# Altium PCB B223.PcbDoc
Units mm, origin at the board's own origin, x right, y up, seen from the top; angles counter-clockwise.
Board outline 22 x 40 mm, 4 copper layers (Top Copper, Signal Layer 1, Signal Layer 2, Bottom Copper), stack 1.57 mm thick; 30 components, 34 nets, 134 pads, 164 vias.
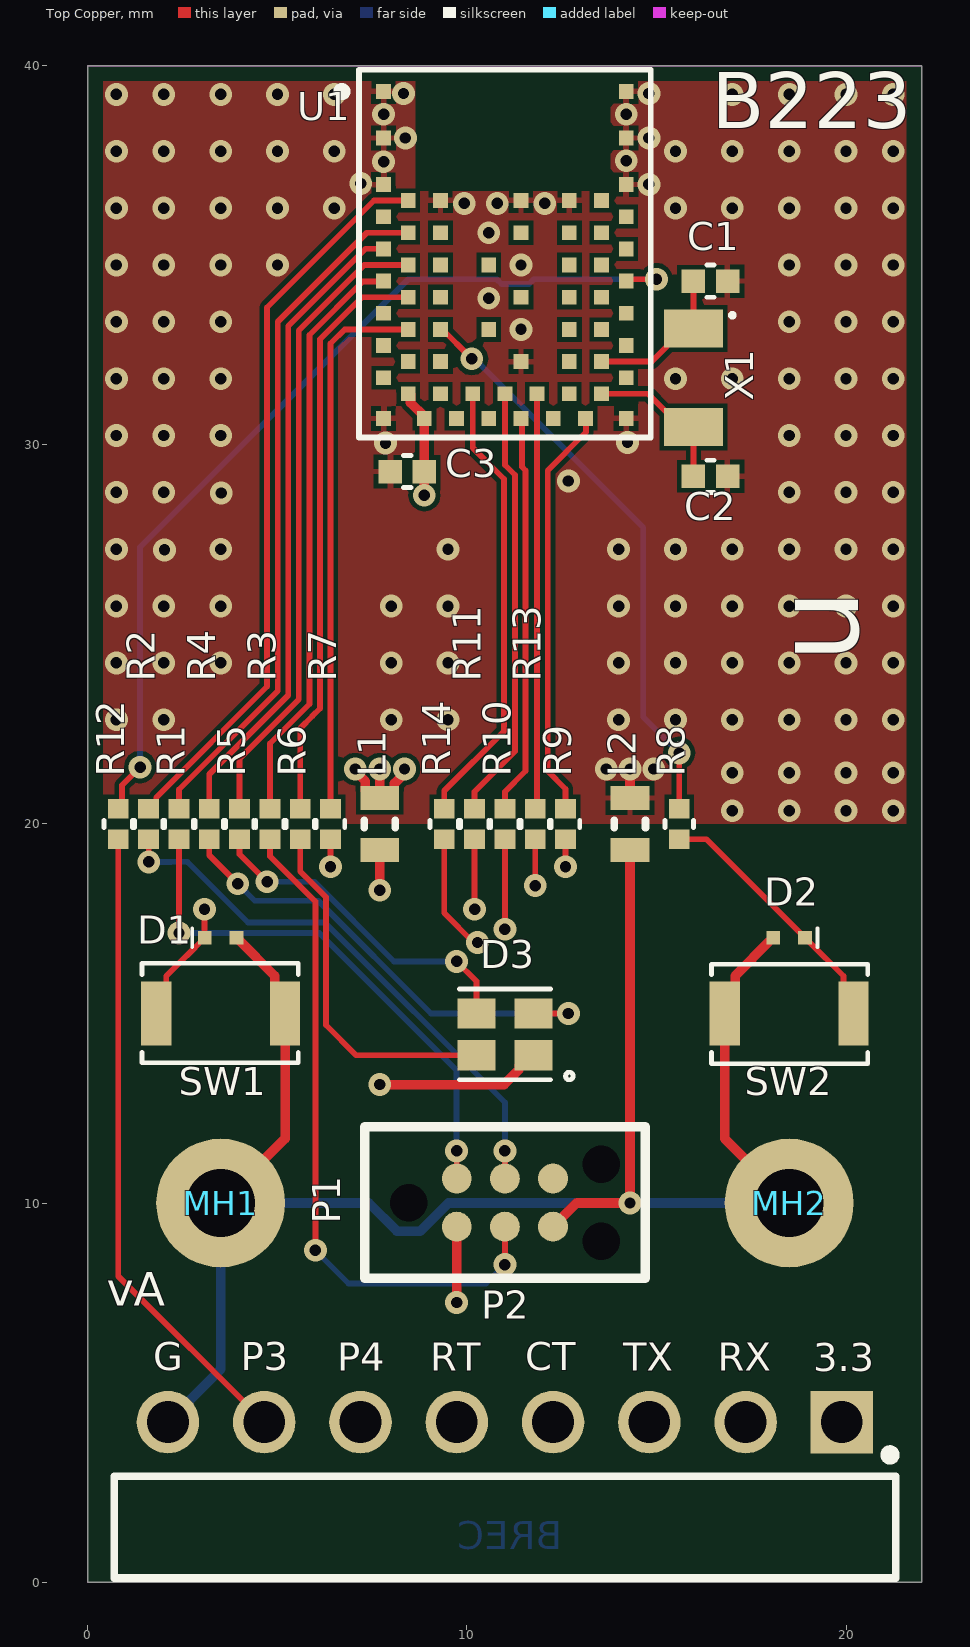
[diagram p0: Top Copper view]
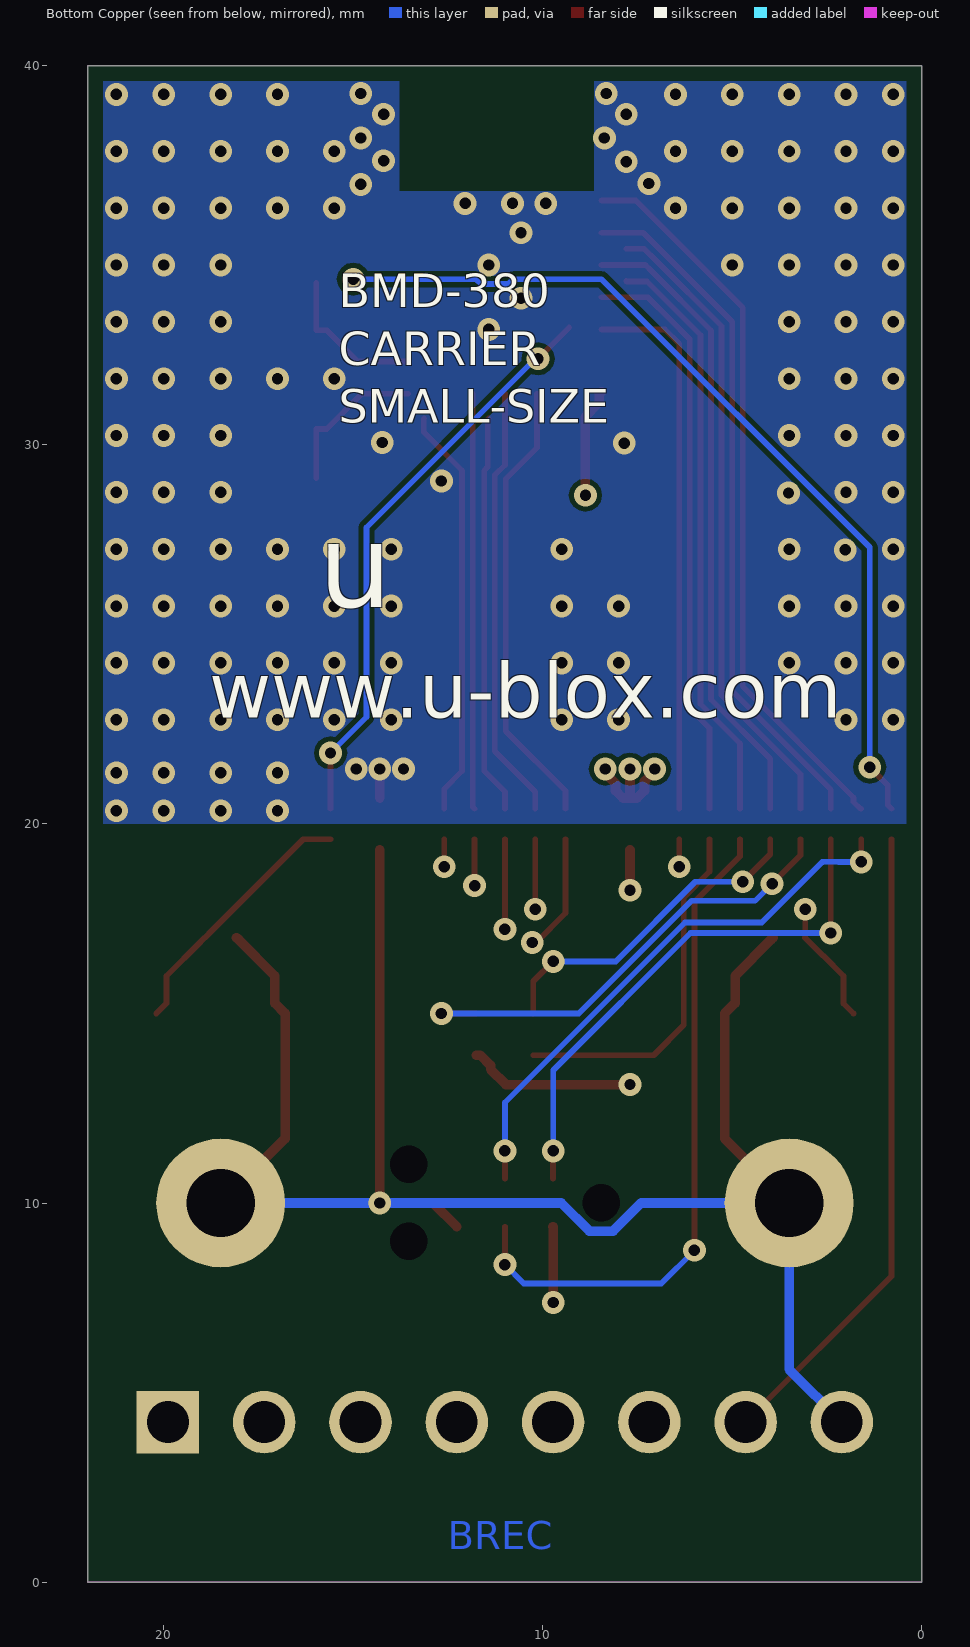
[diagram p1: Bottom Copper view, seen from below]
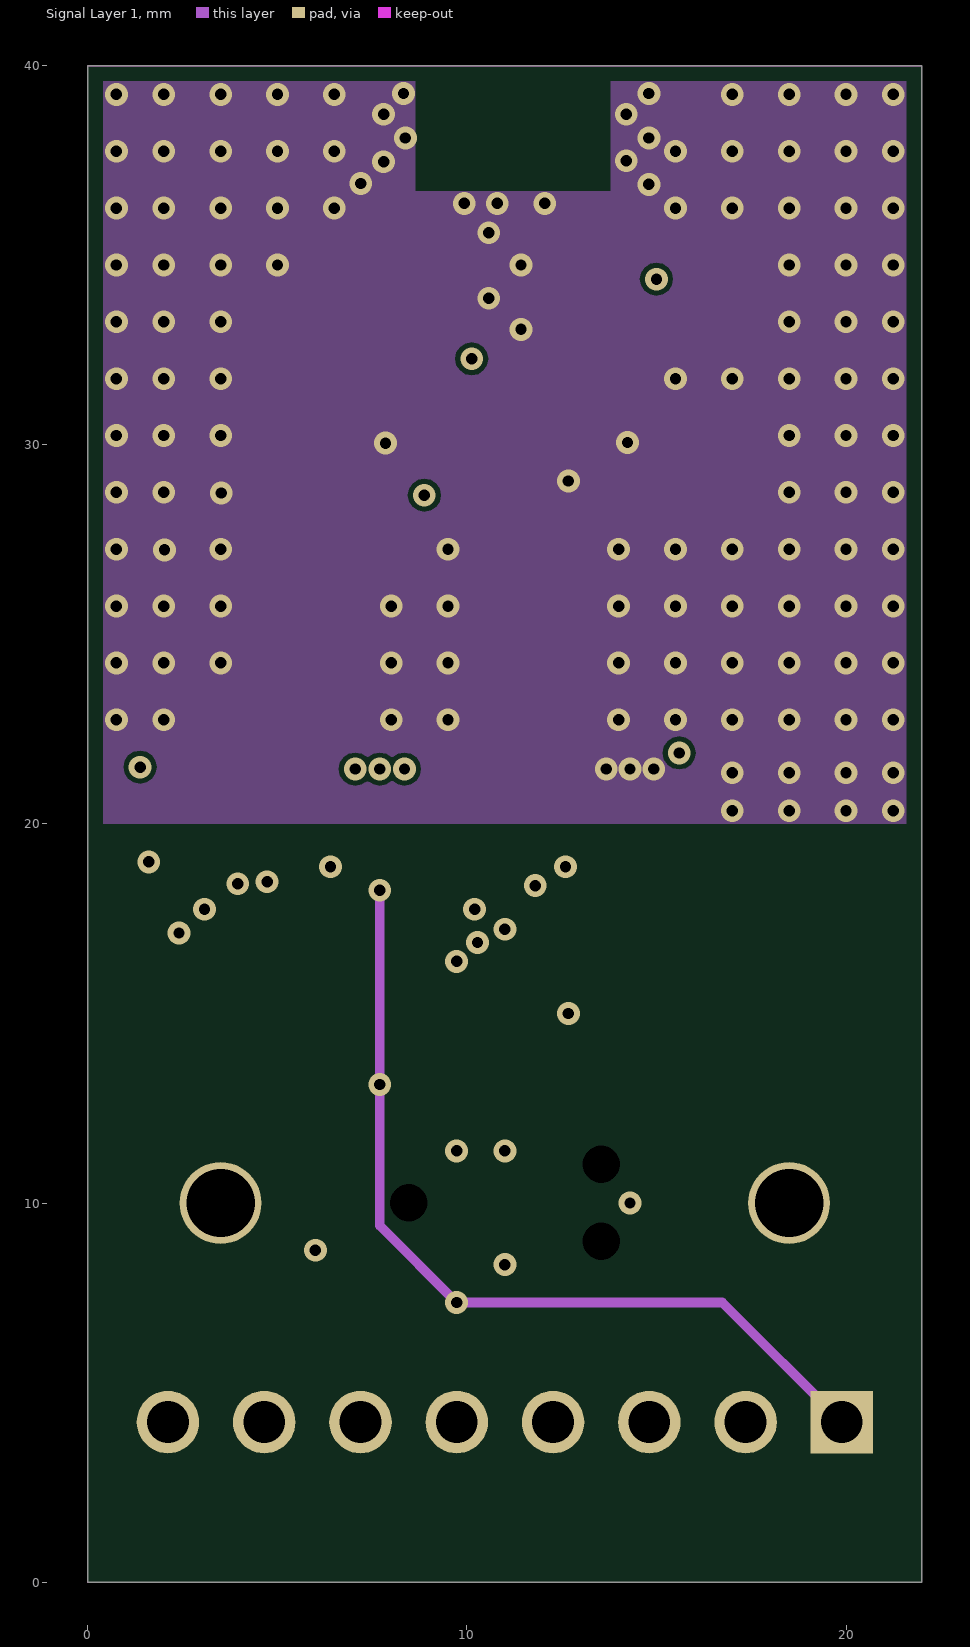
[diagram p2: Signal Layer 1]
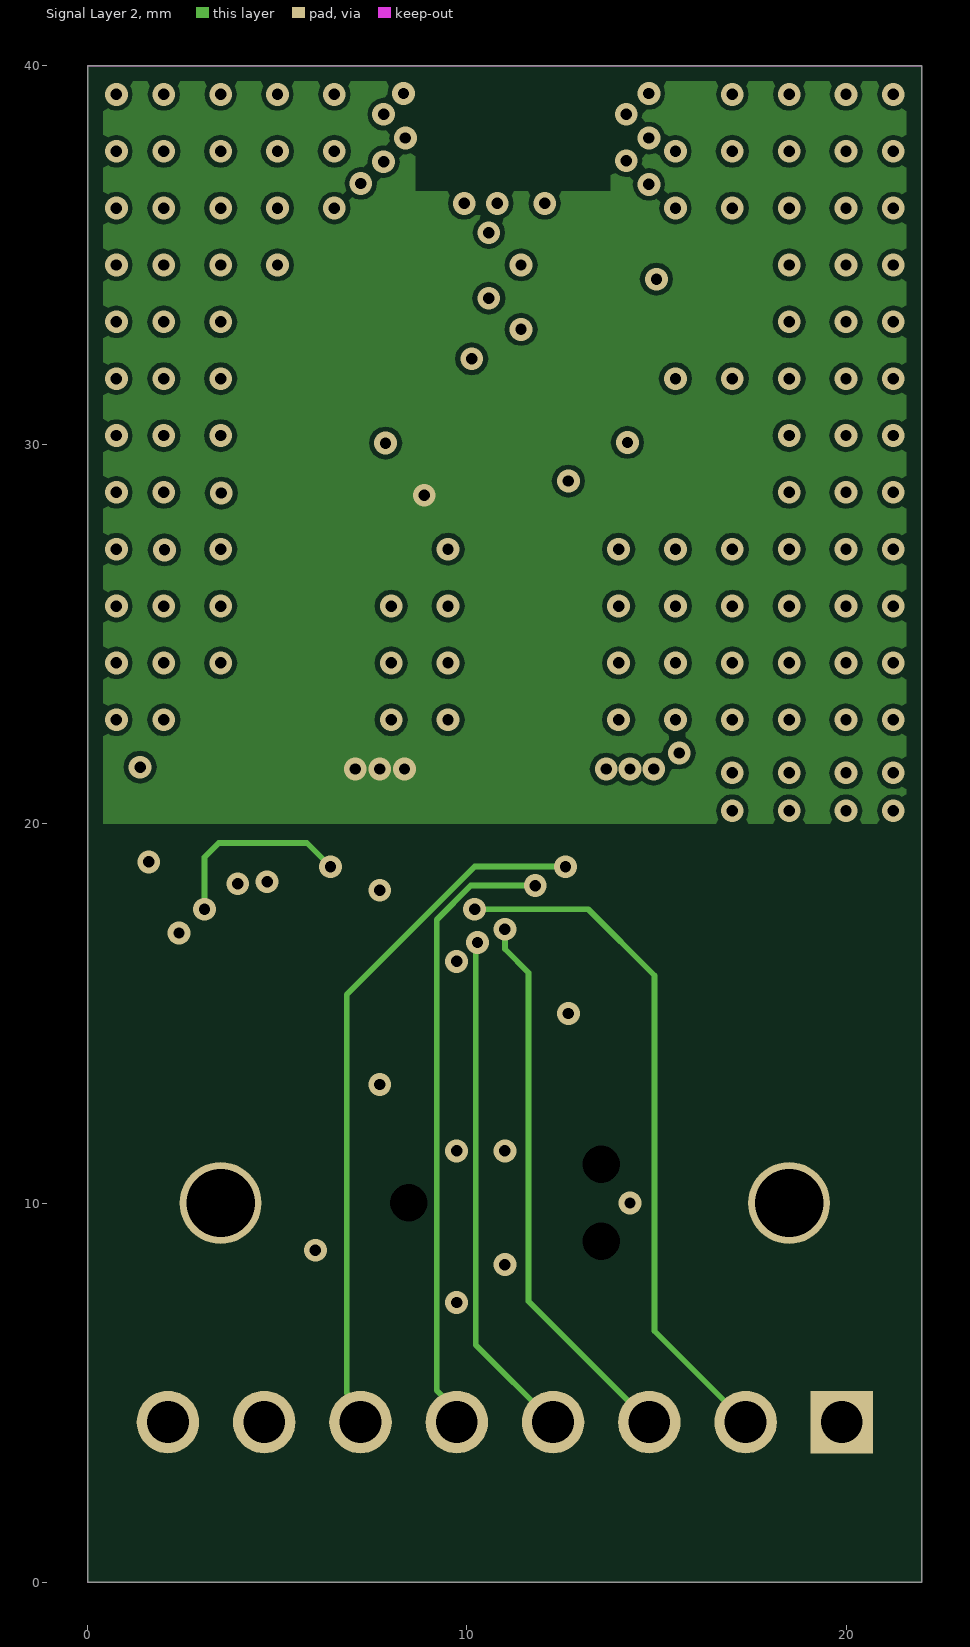
[diagram p3: Signal Layer 2]

## Layer stack, top to bottom
Top Mask: solder mask 0.015, Solder Resist, Dk 3.8
Top Copper: signal copper 0.035
Dielectric 1: prepreg 0.1, 2313, Dk 4.05
Signal Layer 1: signal copper 0.0175
Core: core 1.265, FR-4, Dk 4.5
Signal Layer 2: signal copper 0.0175
Dielectric 2: prepreg 0.1, 2313, Dk 4.05
Bottom Copper: signal copper 0.035
Bottom Mask: solder mask 0.015, Solder Resist, Dk 3.8

## Board outline
0,40 22,40 22,0 0,0

## Design rules (kind name [scope] priority, off if disabled: settings)
BoardOutlineClearance [All] p1: gap=0.4 ignorepadtopadclearanceinfootprint=FALSE
Clearance "Stitching GND" [IsStitchingVia and InNet('GND') vs (IsVia and (Not IsStitchingVia)) Or IsPad] p1: gap=0.127 ignorepadtopadclearanceinfootprint=TRUE
Clearance Clearance_Poly [InPolygon vs OnLayer('Keep-Out Layer') OR (OnLayer('Multi-Layer') AND IsPad  AND Not(PadIsPlated))] p2: gap=0.127 ignorepadtopadclearanceinfootprint=TRUE
Clearance [All] p3: gap=0.127 ignorepadtopadclearanceinfootprint=FALSE except(0: Arc-Text Arc-Hole Track-Text Track-Hole SMDPad-Text SMDPad-Hole THPad-Text THPad-Hole Via-Text Via-Hole Fill-Text Fill-Hole Poly-Text Poly-Hole Region-Text Region-Hole Text-Text Text-Hole)
ComponentClearance [All] p1: gap=0.127 collisioncheckmode=3 verticalgap=0.254 showdistances=FALSE
DiffPairsRouting .14 [All] p1: maxlimit=0.254 minlimit=0.1 mostfreqgap=0.254 toplayer_maxgap=0.1 toplayer_prefgap=0.1 toplayer_minwidth=0.1 toplayer_maxwidth=0.1 toplayer_prefwidth=0.1 midlayer1_mingap=0.254 midlayer1_minwidth=0.381 midlayer1_maxwidth=0.381 midlayer1_prefwidth=0.381 midlayer2_mingap=0.254 midlayer2_minwidth=0.381 midlayer2_maxwidth=0.381 midlayer2_prefwidth=0.381 bottomlayer_maxgap=0.1 bottomlayer_prefgap=0.1 bottomlayer_minwidth=0.1 bottomlayer_maxwidth=0.1 bottomlayer_prefwidth=0.1 maxuncoupledlength=12.7
Height [All] p1: minheight=0 maxheight=25.4 prefheight=2.54
HoleSize [All] p1: absolutevalues=TRUE maxlimit=2540 minlimit=0.127 maxpercent=80.000 minpercent=20.000
HoleToHoleClearance [All] p1: gap=0.152 allowstackedmicrovias=TRUE
MinimumSolderMaskSliver [All] p1: minsoldermaskwidth=0.025
PlaneClearance [InPoly] p1: clearance=0.254
PlaneConnect [All] p1: pad.planeconnectstyle=Relief pad.reliefexpansion=0.508 pad.reliefentries=4 pad.reliefconductorwidth=0.254 pad.reliefairgap=0.254 via.planeconnectstyle=Direct via.reliefexpansion=0.508 via.reliefentries=4 via.reliefconductorwidth=0.254 via.reliefairgap=0.254
PolygonConnect ThermalVias [IsVia] p1: connectstyle=Direct reliefconductorwidth=0.254 reliefentries=4 polygonreliefangle="90 Angle" airgapwidth=0.254
PolygonConnect "PolygonConnect - Power" [InNetClass('')] p2: connectstyle=Relief reliefconductorwidth=0.254 reliefentries=4 polygonreliefangle="90 Angle" airgapwidth=0.127
PolygonConnect PolygonConnect-BGA [InComponentClass('')] p3: connectstyle=Relief reliefconductorwidth=0.152 reliefentries=4 polygonreliefangle="45 Angle" airgapwidth=0.152
PolygonConnect PolygonConnect-General [All] p4: connectstyle=Relief reliefconductorwidth=0.152 reliefentries=4 polygonreliefangle="90 Angle" airgapwidth=0.127
RoutingVias [All] p1: holewidth=0.3 width=0.6 viastyle="Through Hole" minholewidth=0.2 minwidth=0.5 maxholewidth=7 maxwidth=1
SMDEntry [All] p1 off: side=TRUE corner=TRUE anyangle=TRUE
SilkToBoardRegionClearance [All] p1 off:
SilkToSilkClearance [All] p1 off: silktosilkclearance=0.025
SilkToSolderMaskClearance [IsPad] p1 off: minsilkscreentomaskgap=0 clearancetoexposedcopper=TRUE
SolderMaskExpansion SolderMaskExpansion_via [IsVia] p1: expansion=-0.254 istentingtop=TRUE
SolderMaskExpansion [All] p2: expansion=0.05 istentingtop=FALSE
UnRoutedNet [All] p1: checkbadconnections=TRUE
ViasUnderSMD [All] p1: allowed=FALSE
Width [All] p1: maxlimit=2.54 minlimit=0.127 preferedwidth=0.152 toplayer_maxwidth=0.254 toplayer_prefwidth=0.152 bottomlayer_maxwidth=0.254 bottomlayer_prefwidth=0.152 minimp=50.000000 maximp=50.000000 favimp=50.000000
Width Width_1 [All] p2: maxlimit=0.254 minlimit=0.254 preferedwidth=0.254
18 further rules are at their usual default settings.

## Components (designator, comment, footprint, x,y, rotation, side; value= is the part's Value field where it differs from the comment)
C1 "UBXH01-000411410P" "Cap 0402" 16.425,34.325 r0 top value=10P
C2 "UBXH01-000411410P" "Cap 0402" 16.425,29.175 r0 top value=10P
C3 "UBXH01-2021002100N" "Cap 0402" 8.425,29.3 r180 top value=100N
D1 "110-00019" SOD-923 3.5,17 r0 top
D2 "110-00019" SOD-923 18.5,17 r180 top
D3 "115-00011" 4-PLCC 11,14.45 r0 top
L1 "LQW18AN22NJ10D" INDC1608X100X30LL20T10 7.7,20 r90 top
L2 "LQW18AN22NJ10D" INDC1608X100X30LL20T10 14.3,20 r90 top
MH1 "MH_M1.5DNP" MH_M1.5 3.5,10 r0 top
MH2 "MH_M1.5DNP" MH_M1.5 18.5,10 r0 top
P1 "TC2030-IDC-NLDNP" TC2030-IDC-NL 8.46,10.01 r0 top
P2 "61300811021" 61300811021 11,1.45 r0 top
R1 "180-00098220R" "RES 0402 HD" 2.4,20 r270 top value=220R
R2 "180-00098220R" "RES 0402 HD" 1.6,20 r270 top value=220R
R3 "180-00098220R" "RES 0402 HD" 4.8,20 r270 top value=220R
R4 "180-00031499R" "RES 0402 HD" 3.2,20 r270 top value=499R
R5 "180-00098220R" "RES 0402 HD" 4,20 r270 top value=220R
R6 "180-00098220R" "RES 0402 HD" 5.6,20 r270 top value=220R
R7 "180-00098220R" "RES 0402 HD" 6.4,20 r270 top value=220R
R8 "180-00098220R" "RES 0402 HD" 15.6,20 r270 top value=220R
R9 "180-00098220R" "RES 0402 HD" 12.6,20 r90 top value=220R
R10 "180-00098220R" "RES 0402 HD" 11,20 r90 top value=220R
R11 "180-00098220R" "RES 0402 HD" 10.2,20 r90 top value=220R
R12 "180-00098220R" "RES 0402 HD" 0.8,20 r90 top value=220R
R13 "180-00098220R" "RES 0402 HD" 11.8,20 r90 top value=220R
R14 "180-00098220R" "RES 0402 HD" 9.4,20 r90 top value=220R
SW1 "135-00007" B3U-1000P 3.5,15 r0 top
SW2 "135-00007" B3U-1000P 18.5,15 r180 top
U1 "=Value" BMD_LGA63S_950X750X150_CHIP 11,35.05 r0 top
X1 "100-00005" XTAL_3215 15.975,31.775 r270 top

## Footprints (in the part's own frame and the unit in brackets; to place one, negate y for a bottom-side part, rotate by r counter-clockwise, add the part's x,y. Pads: shape width x height; smd on the part's side, far side on the other; paste and mask are expansions set on the pad)
4-PLCC [mm] "4 Pin Plastic Leaded Chip Carrier, 2mm x 2mm"
  rect 1x0.8 smd: 1(0.75,-0.55) 2(-0.75,-0.55) 3(-0.75,0.55) 4(0.75,0.55)
  silkscreen extent -1.2,-1.2 1.8,1.2, body extent -1.05,-1.05 1.05,1.05, height 1.01
61300811021 [mm]
  rect 1.65x1.65 hole 1.1: 1(8.89,2.77)
  round 1.65 hole 1.1: 2(6.35,2.77) 3(3.81,2.77) 4(1.27,2.77) 5(-1.27,2.77) 6(-3.81,2.77) 7(-6.35,2.77) 8(-8.89,2.77)
  silkscreen extent -10.31,-1.35 10.31,2.03, body extent -10.16,-7.27 10.16,3.09, height 2.58
B3U-1000P [mm] "Button Tactile, SMT 4mm x 2.5mm, height 1.2mm"
  rect 0.8x1.7 smd: 1(-1.7,0) 2(1.7,0)
  silkscreen extent -2.07,-1.3 2.05,1.33, body extent -2,-1.25 2,1.25, height 1.6
BMD_LGA63S_950X750X150_CHIP [mm] "WLCSP, 63pin, 0.85mm Pitch, 9.5mm x 7.5mm"
  rect 0.39x0.39 smd: 1(-3.2,4.275) 2(-3.2,3.05) 3(-3.2,1.825) 4(-2.55,1.4) 5(-1.7,1.4) 6(-3.2,0.975) 7(-2.55,0.55) 8(-1.7,0.55) 9(-3.2,0.125) 10(-2.55,-0.3) 11(-1.7,-0.3) 12(-3.2,-0.725) 13(-2.55,-1.15) 14(-1.7,-1.15) 15(-3.2,-1.575) 16(-2.55,-2) 17(-1.7,-2) 18(-3.2,-2.425) 19(-2.55,-2.85) 20(-1.7,-2.85) 21(-3.2,-3.275) 22(-2.55,-3.7) 23(-3.2,-4.35) 24(-2.125,-4.35) 25(-1.7,-3.7) 26(-1.275,-4.35) 27(-0.85,-3.7) 28(-0.425,-4.35) 29(0,-3.7) 30(0.425,-4.35) 31(0.85,-3.7) 32(1.275,-4.35) 33(1.7,-3.7) 34(2.125,-4.35) 35(3.2,-4.35) 36(2.55,-3.7) 37(3.2,-3.275) 38(2.55,-2.85) 39(1.7,-2.85) 40(3.2,-2.425) 41(2.55,-2) 42(1.7,-2) 43(3.2,-1.575) 44(2.55,-1.15) 45(1.7,-1.15) 46(3.2,-0.725) 47(2.55,-0.3) 48(1.7,-0.3) 49(3.2,0.125) 50(2.55,0.55) 51(1.7,0.55) 52(3.2,0.975) 53(2.55,1.4) 54(1.7,1.4) 55(3.2,1.825) 56(3.2,3.05) 57(3.2,4.275) 58(0.425,1.4) 59(0.425,0.55) 60(-0.425,-0.3) 61(0.425,-1.15) 62(-0.425,-2) 63(0.425,-2.85)
  Multi-Layer pour cut-out: -3.75,4.75 -3.75,4.55 -2.36,4.55 -2.36,1.65 2.79,1.65 2.79,4.55 3.75,4.55 3.75,4.75
  silkscreen extent -4.4,-4.85 3.85,4.85, body extent -3.75,-4.75 3.75,4.75, height 1.53
"Cap 0402" [mm] "Chip Capacitor, 2-Leads, Body 1.00x0.50mm, IPC Medium Density"
  rect 0.62x0.62 smd: 1(-0.45,0) 2(0.45,0)
  silkscreen extent -0.1,-0.43 0.1,0.43, body extent -0.55,-0.3 0.55,0.3, height 0.6
INDC1608X100X30LL20T10 [mm] "Chip Inductor, 2-Leads, Body 1.8x1.1mm, IPC High Density"
  rect 0.64x1.02 smd: 1(-0.685,0) 2(0.685,0)
  silkscreen extent -0.1,-0.41 0.1,0.41, body extent -0.9,-0.55 0.9,0.55, height 1
MH_M1.5 [mm] "Mounting Hole M1.5 Metric, 3.4mm diameter pad"
  round 3.4 / inner round 2.159 / far side round 3.4 hole 1.8: 1(0,0)
"RES 0402 HD" [mm] "Chip Resistor, 2-Leads, Body 1.05x0.54mm, IPC High Density"
  rect 0.52x0.55 smd: 1(-0.4,0) 2(0.4,0)
  silkscreen extent -0.1,-0.38 0.1,0.38, body extent -0.55,-0.3 0.55,0.3, height 0.4
SOD-923 [mm] "SOD-923, 2-Leads, Body 1.25x2.50mm, IPC High Density,"
  rect 0.36x0.35 smd mask+0.05: 1(-0.42,0) 2(0.42,0)
  silkscreen extent -0.75,-0.25 -0.75,0.25, body extent -0.4,-0.3 0.4,0.3, height 0.4
TC2030-IDC-NL [mm] "Tag-Connect 6-Pin No Legs"
  round 0.9 hole 0.995 unplated: 0(0,0) 0(5.08,-1.016) 0(5.08,1.016)
  round 0.79 smd paste-0.39: 1(1.27,-0.635) 2(1.27,0.635) 3(2.54,-0.635) 4(2.54,0.635) 5(3.81,-0.635) 6(3.81,0.635)
  silkscreen extent -1.16,-2 6.24,2
XTAL_3215 [mm] "XTAL, 2-Leads, Body 1.50x3.20mm"
  rect 1x1.55 smd: 1(-1.3,0) 2(1.3,0)
  silkscreen extent -1.7,0.98 -1.6,1.07, body extent -1.65,-0.8 1.65,0.8, height 0.9

## Part data
C1 C2: library part UBXH01-0004114, "CAP CER COG 0402", Manufacturer="Murata Manufacturing Company, Ltd.", Manufacturer 2=None, Manufacturer P/N=GRM1555C1H100CZ01, Max Voltage=25.0V, Tolerance=5%, Automotive=None, Critical=None, Editor=martin.frauchiger, Env=ROHS, Manufacturer 3=None, Manufacturer P/N 2=None, Manufacturer P/N 3=None, Max Current=None, Max Operating Temp=None, Max Power=None, Mfg P/N Datasheet=None, Mfg P/N Datasheet 2=None, Mfg P/N Datasheet 3=None, Mfg P/N Released=Yes, Mfg P/N Released 2=None, Mfg P/N Released 3=None, Mfg P/N Split=0, Mfg P/N Split 2=None, Mfg P/N Split 3=None, Mfg P/N Status=Obsolete, Mfg P/N Status 2=None, Mfg P/N Status 3=None, Min Operating Temp=None, Part Number=UBXH01-0004114, Part Type=Capacitor, Perferred=PREF, Permitted Use="Volume Products", RefDes=C, Release Data="2005-09-01 15:36:53", Released by=martin.frauchiger, Single Source=None, Size=0x0y, UBX Wiki=https://wiki.u-blox.com/bin/view/Operations/PartDetails?index=5225
C3: library part UBXH01-2021002, "CAP CER X5R 0402", Manufacturer="Samsung Electro-Mechanics", Manufacturer 2=None, Manufacturer P/N=CL05A104KP5NNN, Max Voltage=10.0V, Tolerance=10%, Automotive=None, Critical=None, Editor=roland.rust, Env=GREEN, Manufacturer 3=None, Manufacturer P/N 2=None, Manufacturer P/N 3=None, Max Current=None, Max Operating Temp=None, Max Power=None, Mfg P/N Datasheet=https://wiki.u-blox.com/bin/view/Generic/Docs/DocumentSummary?index=28113, Mfg P/N Datasheet 2=None, Mfg P/N Datasheet 3=None, Mfg P/N Released=Yes, Mfg P/N Released 2=None, Mfg P/N Released 3=None, Mfg P/N Split=0, Mfg P/N Split 2=None, Mfg P/N Split 3=None, Mfg P/N Status=Active, Mfg P/N Status 2=None, Mfg P/N Status 3=None, Min Operating Temp=None, Part Number=UBXH01-2021002, Part Type=Capacitor, Perferred=PREF, Permitted Use="Volume Products", RefDes=C, Release Data="2005-07-22 13:59:44", Released by=roland.rust, Single Source=None, Size=0x0y, UBX Wiki=https://wiki.u-blox.com/bin/view/Operations/PartDetails?index=5759
D1 D2: "Diode, ESD9B, 3.3V, ST5G, SOD-923", Manufacturer="ON Semiconductor", Manufacturer P/N=ESD9B3.3ST5G, MFG Package=SOD-923, Package Type=SOD, Part Name="Diode TVS 3.3V SOD-923", Voltage=3.3V, Arena Link=https://app.bom.com/a/4M5DJQ9Q9SR7DV4H?v=spec.summary, Body Size="0.8mm x 0.6mm", Component Mounting Type=SMT, Diode Type=TVS, Height=0.4mm, Item_Phase=Production, Part Number=110-00019, Part_Type=Diode, Pins=2, Revision=0A, Supplier 1=Arrow, Supplier Part Number 1=ESD9B3.3ST5G, Use in new designs=Yes
D3: "LED, RGB Diffused SMT, PLCC4 4 Pin", Color=RGB, Current="20mA Red, 10mA Green, 10mA, Blue", Manufacturer="Cree, Inc.", Manufacturer P/N=CLMVB-FKA-CFHEHLCBB7a363, MFG Package=PLCC4, Package Type=Custom, Part Name="LED RGB SMT 2mm x 2mm", Supplier Part Number 1=941-CLMVBFKACFHEHLCB, Voltage=5V, Arena Link=https://app.bom.com/a/UCV39GZGZIHY581D?v=spec.summary, Body Size="2.0mm x 2.0mm", Component Mounting Type=SMT, Height=1mm, Item_Phase=Production, Mounting Type=Vertical, Number of Circuits=3, Part Number=115-00011, Part_Type=LED, Pins=4, Revision=0A, Supplier 1=Mouser, Use in new designs=Yes, Vf="2V Red, 3V Green, 3V Blue"
L1 L2: library part CMP-2000-06600-1, "Chip Inductor, 22 nH, +/-5%, 640 mA, -55 to 125 degC, 0603 (1608 Metric), RoHS, Tape and Reel", Current Rating=640mA, DC Resistance (DCR)=99mOhmMax, Frequency - Self Resonant=3.2GHz, Frequency - Test=100MHz, Inductance=22nH, Manufacturer=Murata, Operating Temperature=-55°C~125°C, Package / Case=0603(1608Metric), Package Description="2-Pin Surface Mount Device, Body 1.6 x 0.8 mm", Package Reference=0603, Q @ Freq=42@250MHz, Standard Package=1, Tolerance=±5%, Category=Inductors,Coils,Chokes, Datasheet URL=http://search.murata.co.jp/Ceramy/image/img/PDF/ENG/L0075S0080LQW18A_10.pdf, Datasheet Version=11/2011, Family=FixedInductors, Height - Seated (Max)="0.039\"(1.00mm)", Manufacturer URL=http://www.murata.com/, Material - Core=Non-Magnetic, Mounting Technology=SurfaceMount, Mounting Type=SurfaceMount, Online Catalog=LQWSeries, Other Names=490-6876-1, Packaging=CutTape(CT), Product Training Modules=InductorProductsChipRFInductors, Series=LQW18A_10, Shielding=Unshielded, Size / Dimension="0.063\"Lx0.031\"W(1.60mmx0.80mm)", Type=Wirewound
MH1 MH2: library part MH_M1.5, "1.5M screw mounting hole, plated", Added By="Jeremy D", Added Date=7/9/2015, DNP=DNP, Height=0mm, Part Number=MH_M1.5, Size="3.4mm x 3.4mm", Type="Mounting Hole"
P1: library part TC2030-IDC-NL, "CON PADS FOR CBL PLUG-OF-NAILS 6-PIN NO LEGS", Manufacturer="TAG Connect", Added By="Paul B", Added Date=4/22/2015, DNP=DNP, Height=0, Manufacturer P/N=TC2030-IDC-NL, Part Number=TC2030-IDC-NL, Size="6.731mm x 12.446mm"
P2: library part CMP-1502-01075-1, "THT Angled Pin Header WR-PHD, Pitch 2.54 mm, Single Row, 8 pins", Contact Resistance=20mOhm, Manufacturer="Wurth Electronics", Operating Temperature=-40to105degC, Rated Current=3A, Withstanding Voltage=500VAC, Working Voltage=250VAC, Datasheet URL=https://katalog.we-online.de/em/datasheet/6130xx11021.pdf, Gender=Male, Manufacturer Part Number=61300811021, Manufacturer URL=http://www.we-online.de, Mounting Technology=THT, Orientation=Angled, Package Reference=61300811021, Packaging=Bag, Part Number=61300811021, Pin Number=8, Pitch=2.54mm, Publisher=WurthElektronik, Row Number=Single
R1 R2 R3 R5 R6 R7 R8 R9 R10 R11 R12 R13 R14: library part 180-00098, "Resistor, 220ohm, 5%, 1/16W, 0402.", Manufacturer="Panasonic Electronic Components", Manufacturer 2="Samsung Electro-Mechanics America, Inc", Manufacturer P/N=ERJ-2GEJ221X, Manufacturer P/N 2=RC1005J221CS, Part Name="RES SMD 220 OHM 5% 1/16W 0402", Power=1/16W, Supplier Part Number 1=P220JCT-ND, Tolerance="+/- 5%", Alternate Footprint Ref="RES 0402", Arena Link=https://app.bom.com/a/8Q9HNUDUDWVBJC30?v=spec.summary, Component Mounting Type=SMT, Height=0.4mm, Item_Phase=Production, Part Number=180-00098, Part_Type=Resistor, Pins=2, Revision=0C, Size=0402, Supplier 1=Digi-Key, Supplier 2=Digi-Key, Supplier Part Number 2=1276-4360-1-ND, Use in new designs=Yes
R4: library part 180-00031, "Resistor, 499ohm, 1%, 1/16W, 0402", Manufacturer="Rohm Semiconductor", Manufacturer 2="Samsung Electro-Mechanics America, Inc", Manufacturer P/N=MCR01MRTF4990, Manufacturer P/N 2=RC1005F4990CS, Part Name="RES SMD 499 OHM 1% 1/16W 0402", Power=1/16W, Supplier Part Number 1=RHM499CDCT-ND, Tolerance="+/- 1%", Alternate Footprint Ref="RES 0402", Arena Link=https://app.bom.com/a/Q8RZ5CVCVEDU1SS5?v=spec.summary, Component Mounting Type=SMT, Height=0.4mm, Item_Phase=Production, Part Number=180-00031, Part_Type=Resistor, Pins=2, Revision=0D, Size=0402, Supplier 1=Digi-Key, Supplier 2=Digi-Key, Supplier Part Number 2=1276-3992-1-ND, Use in new designs=Yes
SW1 SW2: "Button, Momentary SPST-NO, 0.05A, 12V, 3mm x 2.5mm", Current=50mA, Manufacturer="Omron Electronics Inc-EMC Div", Manufacturer P/N=B3U-1000P, Part Name="SWITCH TACTILE SPST-NO 0.05A 12V", Supplier Part Number 1=SW1020CT-ND, Voltage=12VDC, Arena Link=https://app.bom.com/a/TBU28FYFYHGV5FQ0?v=spec.summary, Body Size="3mm x 2.5mm", Component Mounting Type=SMT, Height=1.2mm, Item_Phase=Production, Part Number=135-00007, Part_Type=Button, Pins=2, Revision=0A, Supplier 1=Digi-Key, Switch/Button Circuit=SPST, Switch/Button Function=Off-Mom, Use in new designs=Yes
U1: library part BMD-380, "u-blox BMD-380 Bluetooth 5 LE, 802.15.4 module", Manufacturer=u-blox, Manufacturer P/N=BMD-380-A-R, Body Size="9.5mm x 7.5mm", Height=1.5mm, Internal Antenna=Yes, Part Number=BMD-380, Protocol="BT 5.1 LE, 802.15.4, 2.4GHz Proprietary"
X1: "XTAL, 2Pin, 32.768kHz, 7pF 20ppm", Frequency=32.768kHz, Frequency Tolerance=20ppm, Manufacturer=Epson, Manufacturer 2="AVX Corporation", Manufacturer P/N="FC-135 32.7680KA-AG3", Manufacturer P/N 2=ST3215SB32768C0HPWBB, MFG Package=2-SMD, Part Name="XTAL 32.768kHz 7pF 20ppm 3215", Supplier Part Number 1=SER4086CT-ND, Arena Link=https://app.bom.com/a/L3MU07Q7Q98O5PC8?v=spec.summary, Body Size="3.2mm x 1.5mm", CL=7pF, Component Mounting Type=SMT, Height=0.9mm, Item_Phase=Production, Part Number=100-00005, Part_Type=Crystal/Oscillator, Pins=2, Revision=0C, Supplier 1=Digi-Key, Supplier 2=Digi-Key, Supplier Part Number 2=1253-1113-1-ND, Use in new designs=Yes

## Via types
v1: diameter 0.6, hole 0.3, Top Copper to Bottom Copper, tented both sides, 164 vias

## Nets (pads, with @x,y where several pads share a name; then routed paths per layer and width w, separated by ;. In a path a pad name is that pad's centre, name@x,y a point inside that pad or via, vN(x,y) a via of type N, cw(c..) or ccw(c..) an arc to the next point about the centre after c; other vN are vias at no path point)
3V3: D3.1 L1.1 P1.1 P2.1 | length 30.7
  Top Copper w0.254: v1(7.7,13.125) 10.975,13.125 11.377,13.527 11.377,13.627 11.65,13.9 D3.1 ; v1(7.7,18.25) L1.1 ; v1(9.725,7.375) 9.725,9.37 P1.1
  Signal Layer 1 w0.254: v1(7.7,18.25) v1(7.7,13.125) 7.7,9.4 v1(9.725,7.375) 16.735,7.375 P2.1
3V3_M: C3.1 L1.2 U1.22 U1.24 | length 6.1
  Top Copper w0.254: v1(7.05,21.45) 7.05,21.395 7.317,21.128 7.317,20.878 7.51,20.685 L1.2 ; v1(7.7,21.45) L1.2 ; v1(8.35,21.45) 8.284,21.384 8.284,21.269 8.083,21.068 8.083,20.878 7.89,20.685 L1.2 ; U1.22@8.45,31.4 8.511,31.339 8.511,31.114 U1.24@8.875,30.75 ; v1@8.875,28.575 v1@8.875,28.625 ; v1@8.875,28.725 v1@8.875,28.625 ; U1.24 C3.1 v1@8.875,28.625
  other v1: 8.875,28.675
B1_M: R7.1 U1.16 | length 14.5
  Top Copper w0.152: R7.1 6.4,32.675 6.775,33.05 U1.16
B2_M: R8.1 U1.17 | length 15.4
  Top Copper w0.152: U1.17@9.3,33.1 v1(10.125,32.275) ; R8.1 v1(15.6,21.875)
  Bottom Copper w0.152: v1@10.125,32.35 14.65,27.825 14.65,22.825 v1(15.6,21.875)
BLUE: D3.2 R6.2 | length 9.5
  Top Copper w0.152: R6.2 5.6,18.745 6.279,18.066 6.279,14.696 7.075,13.9 D3.2
BLUE_M: R6.1 U1.13 | length 15.4
  Top Copper w0.152: R6.1 5.6,22.525 5.925,22.85 5.925,22.855 6.12,23.05 6.12,32.79 6.659,33.329 7.23,33.9 U1.13
BUTTON_1: D1.1 R7.2 SW1.1 | length 9.1
  Top Copper w0.152: SW1.1 2.064,15.264 2.064,15.989 2.597,16.522 2.608,16.522 3.078,16.991 D1.1@3.078,17.002 ; v1(3.075,17.75) 3.075,17.005 D1.1@3.078,17.002 ; D1.1 D1.1@3.078,17.002 ; v1(6.4,18.875) R7.2
  Signal Layer 2 w0.152: v1(3.075,17.75) 3.075,19.125 3.45,19.5 5.775,19.5 v1(6.4,18.875)
BUTTON_2: D2.1 R8.2 SW2.1 | length 6.9
  Top Copper w0.152: R8.2 16.32,19.6 18.816,17.104 18.816,17.099 18.915,17 D2.1 18.925,17 19.024,16.901 19.024,16.896 19.931,15.989 19.931,15.269 SW2.1
CTS: P2.4 R14.1 | length 16.7
  Top Copper w0.152: R14.1 9.4,17.65 10.175,16.875 v1(10.278,16.875)
  Signal Layer 2 w0.152: v1(10.278,16.875) 10.278,16.872 10.228,16.822 10.228,6.262 P2.4
GND: D1.2 D2.2 L2.1 MH1.1 MH2.1 P1.5 P2.8 SW1.2 SW2.2 | length 50
  Top Copper w0.254: MH1.1 5.2,11.7 SW1.2 4.927,15.273 4.927,15.993 3.973,16.947 3.973,16.952 3.925,17 D1.2 ; P1.5 12.895,10 v1(14.3,10) L2.1 ; D2.2 18.075,17 18.027,16.952 18.027,16.947 17.073,15.993 17.073,15.273 SW2.2 16.8,11.7 MH2.1
  Bottom Copper w0.254: P2.8 3.5,5.61 MH1.1 7.407,10 8.149,9.259 8.771,9.259 9.513,10 v1(14.3,10) MH2.1
GND_M: C1.2 C2.2 C3.2 L2.2 U1.1 U1.2 U1.3 U1.5 U1.23 U1.35 U1.54 U1.55 U1.56 U1.57 U1.58 U1.63 | length 0.7
  Top Copper w0.254: L2.2 v1@14.3,21.375
  other v1: 17,20.35 18.5,20.35 20,20.35 21.25,20.35 17,21.35 18.5,21.35 20,21.35 21.25,21.35 13.675,21.45 14.3,21.45 14.925,21.45 0.75,22.75 2,22.75 8,22.75 9.5,22.75 14,22.75 15.5,22.75 17,22.75 18.5,22.75 20,22.75 21.25,22.75 0.75,24.25 2,24.25 3.5,24.25 8,24.25 9.5,24.25 14,24.25 15.5,24.25 17,24.25 18.5,24.25 20,24.25 21.25,24.25 0.75,25.75 2,25.75 3.5,25.75 8,25.75 9.5,25.75 14,25.75 15.5,25.75 17,25.75 18.5,25.75 20,25.75 21.25,25.75 2.018,27.232 0.75,27.25 3.5,27.25 9.5,27.25 14,27.25 15.5,27.25 17,27.25 18.5,27.25 20,27.25 21.25,27.25 3.518,28.732 0.75,28.75 2,28.75 18.5,28.75 20,28.75 21.25,28.75 12.675,29.05 7.85,30.05 14.233,30.067 0.75,30.25 2,30.25 3.5,30.25 18.5,30.25 20,30.25 21.25,30.25 0.75,31.75 2,31.75 3.5,31.75 15.5,31.75 17,31.75 18.5,31.75 20,31.75 21.25,31.75 11.425,33.05 0.75,33.25 2,33.25 3.5,33.25 18.5,33.25 20,33.25 21.25,33.25 10.575,33.872 0.75,34.75 2,34.75 3.5,34.75 5,34.75 11.425,34.75 18.5,34.75 20,34.75 21.25,34.75 10.575,35.6 0.75,36.25 2,36.25 3.5,36.25 5,36.25 6.5,36.25 15.5,36.25 17,36.25 18.5,36.25 20,36.25 21.25,36.25 9.925,36.375 10.8,36.375 12.05,36.375 14.8,36.875 7.2,36.9 7.8,37.475 14.2,37.5 0.75,37.75 2,37.75 3.5,37.75 5,37.75 6.5,37.75 15.5,37.75 17,37.75 18.5,37.75 20,37.75 21.25,37.75 8.375,38.1 14.8,38.1 7.8,38.725 14.2,38.725 0.75,39.25 2,39.25 3.5,39.25 5,39.25 6.5,39.25 17,39.25 18.5,39.25 20,39.25 21.25,39.25 8.325,39.275 14.8,39.275
GREEN: D3.3 R5.2 | length 8.9
  Top Copper w0.152: R5.2 4,19.2 v1(4.725,18.475) ; v1(9.725,16.375) 10.25,15.85 D3.3
  Bottom Copper w0.152: v1(4.725,18.475) 5.975,18.475 8.075,16.375 v1(9.725,16.375)
GREEN_M: R5.1 U1.10 | length 16.9
  Top Copper w0.152: R5.1 4,21.72 5.562,23.282 5.562,33.021 7.136,34.595 7.291,34.75 U1.10
LFCLK1: C2.1 U1.36 X1.2 | length 4.1
  Top Copper w0.152: U1.36 14.775,31.35 15.7,30.425 15.975,30.425 C2.1@15.975,29.125
LFCLK2: C1.1 U1.38 X1.1 | length 4
  Top Copper w0.152: U1.38 14.875,32.2 15.7,33.025 15.975,33.025 C1.1@15.975,34.275
NetR9_2: R9.2 U1.34 | length 10.9
  Top Copper w0.152: R9.2 12.6,20.925 12.129,21.396 12.129,29.329 13.141,30.341 13.141,30.684 U1.34
NetR10_2: R10.2 U1.30 | length 10.6
  Top Copper w0.152: R10.2 11,20.85 11.546,21.396 11.546,29.329 11.45,29.425 11.45,30.675 U1.30
NetR11_2: R11.2 U1.29 | length 11.5
  Top Copper w0.152: R11.2 10.2,20.85 11.267,21.917 11.267,29.208 11,29.475 U1.29
NetR12_2: R12.2 U1.46 | length 24.6
  Top Copper w0.152: R12.2 0.899,20.499 0.899,21.024 v1(1.375,21.5) ; U1.46@14.2,34.375 v1(15,34.375)
  Bottom Copper w0.152: v1(1.375,21.5) 1.375,27.3 8.45,34.375 10.783,34.375 10.911,34.247 11.633,34.247 11.761,34.375 v1(15,34.375)
NetR13_2: R13.2 U1.31 | length 11
  Top Copper w0.152: R13.2 11.85,20.45 U1.31
NetR14_2: R14.2 U1.27 | length 11.9
  Top Copper w0.152: R14.2 9.4,20.875 10.975,22.45 10.975,29.1 10.15,29.925 U1.27
nRESET: P1.3 R3.2 | length 17.9
  Top Copper w0.152: R3.2 4.8,19.15 6,17.95 v1(6,8.75) ; v1(11,8.375) P1.3
  Bottom Copper w0.152: v1(6,8.75) 6.875,7.875 9.514,7.875 9.517,7.878 9.933,7.878 9.936,7.875 10.5,7.875 v1(11,8.375)
nRESET_M: R3.1 U1.12 | length 15.5
  Top Copper w0.152: R3.1 4.8,22.125 5.841,23.166 5.841,32.905 7.252,34.316 7.791,34.316 U1.12
P0.03: P2.7 R12.1 | length 17
  Top Copper w0.152: R12.1 0.8,8.07 P2.7
P0.04: P2.6 R9.1 | length 19.3
  Top Copper w0.152: v1(12.6,18.875) R9.1
  Signal Layer 2 w0.152: P2.6 7.19,4.625 6.825,4.99 6.825,15.5 10.203,18.878 12.597,18.878 v1(12.6,18.875)
RED: D3.4 R4.2 | length 12.6
  Top Copper w0.152: R4.2 3.2,19.175 v1(3.95,18.425) ; D3.4 v1(12.675,15)
  Bottom Copper w0.152: v1(3.95,18.425) 4.403,17.972 4.933,17.972 4.937,17.976 6.074,17.976 9.05,15 v1(12.675,15)
RED_M: R4.1 U1.9 | length 17
  Top Copper w0.152: R4.1 3.2,21.314 5.283,23.397 5.283,33.136 7.021,34.874 7.322,35.175 U1.9
RTS: P2.5 R13.1 | length 17.7
  Top Copper w0.152: v1(11.8,18.375) R13.1
  Signal Layer 2 w0.152: P2.5 9.73,4.523 9.2,5.053 9.2,17.475 10.1,18.375 v1(11.8,18.375)
RXD: P2.2 R11.1 | length 20.1
  Top Copper w0.152: v1(10.2,17.75) R11.1
  Signal Layer 2 w0.152: v1(10.2,17.75) 13.2,17.75 14.95,16 14.95,6.62 P2.2
SWCLK: P1.4 R2.2 | length 14.6
  Top Copper w0.152: v1(1.6,19) R2.2 ; P1.4 v1(11,11.375)
  Bottom Copper w0.152: v1(1.6,19) 2.189,19 2.192,19.003 2.608,19.003 2.611,19 2.625,19 4.221,17.404 6.246,17.404 11,12.65 v1(11,11.375)
SWCLK_M: R2.1 U1.4 | length 19.4
  Top Copper w0.152: R2.1 1.615,20.4 1.799,20.584 1.799,20.702 4.725,23.628 4.725,33.627 7.548,36.45 U1.4
SWDIO: P1.2 R1.2 | length 14.2
  Top Copper w0.152: v1(2.4,17.125) R1.2 ; v1(9.725,11.375) 9.728,11.372 9.728,10.647 P1.2
  Bottom Copper w0.152: v1(2.4,17.125) 6.1,17.125 9.725,13.5 v1(9.725,11.375)
SWDIO_M: R1.1 U1.7 | length 18.3
  Top Copper w0.152: R1.1 2.4,20.909 5.004,23.513 5.004,33.252 7.352,35.6 U1.7
TXD: P2.3 R10.1 | length 17
  Top Copper w0.152: v1(11,17.225) R10.1
  Signal Layer 2 w0.152: v1(11,17.225) 11,16.7 11.625,16.075 11.625,7.405 P2.3
pads on no net: P1.0 P1.6 U1.6 U1.8 U1.11 U1.14 U1.15 U1.18 U1.19 U1.20 U1.21 U1.25 U1.26 U1.28 U1.32 U1.33 U1.37 U1.39 U1.40 U1.41 U1.42 U1.43 U1.44 U1.45 U1.47 U1.48 U1.49 U1.50 U1.51 U1.52 U1.53 U1.59 U1.60 U1.61 U1.62

## Polygon pours and split planes (outlines as drawn)
GND_M on Top Copper "GND_M_L01_P014" (solid, remove dead copper, pour order 14): 0,40 0,20 22,20 22,40
GND_M on Bottom Copper "GND_M_L04_P015" (solid, remove dead copper, pour order 15): 0,40 0,20 22,20 22,40
GND_M on Signal Layer 1 "NONET_L-01_P-001" (solid, remove dead copper, pour order 16): 0,40 22,40 22,20 0,20
3V3_M on Signal Layer 2 "NONET_L-01_P-001" (solid, remove dead copper, pour order 17): 0,40 22,40 22,20 0,20

## Keep-outs
Keep-Out Layer:
  the board outline again, w0.025

## Other copper
Top Copper:
  pour cut-out: 10.1,10.625 11.9,10.625 12.25,10.275 12.25,9.725 11.9,9.375 10.1,9.375 10.1,9.4 9.75,9.75 9.75,10.275
Bottom Copper:
  pour cut-out: 9.688,0.4 9.688,1.45 12.313,1.45 12.313,0.4
  text "BREC" at 12.512,0.614 h1.27

## Silkscreen, mask and mechanical layers (free items; w line width, h text height)
Top Overlay:
  text "B223" at 16.463,37.867 h2.54
  text "u" at 21.05,24.25 h3.81 r90
  text "vA" at 0.5,7 h1.52
  text "G" at 1.724,5.339 h1.27
  text "P3" at 4.026,5.339 h1.27
  text "P4" at 6.577,5.325 h1.27
  text "RT" at 9.025,5.325 h1.27
  text "CT" at 11.534,5.339 h1.27
  text "TX" at 14.117,5.325 h1.27
  text "RX" at 16.611,5.325 h1.27
  text "3.3" at 19.136,5.314 h1.27
Bottom Overlay:
  text "BMD-380 / CARRIER / SMALL-SIZE" at 15.388,30.3 h1.52
  text "u" at 15.913,24.994 h3.81
  text "www.u-blox.com" at 18.806,22.309 h2.5
Route Tool Path:
  the board outline again, w0.127